# Altium PCB adaptador3.PcbDoc
Units mil, origin at the board's own origin, x right, y up, seen from the top; angles counter-clockwise.
Board outline 3895 x 3895 mil, 2 copper layers (Top Layer, Bottom Layer); 69 components, 76 nets, 366 pads, 115 vias.
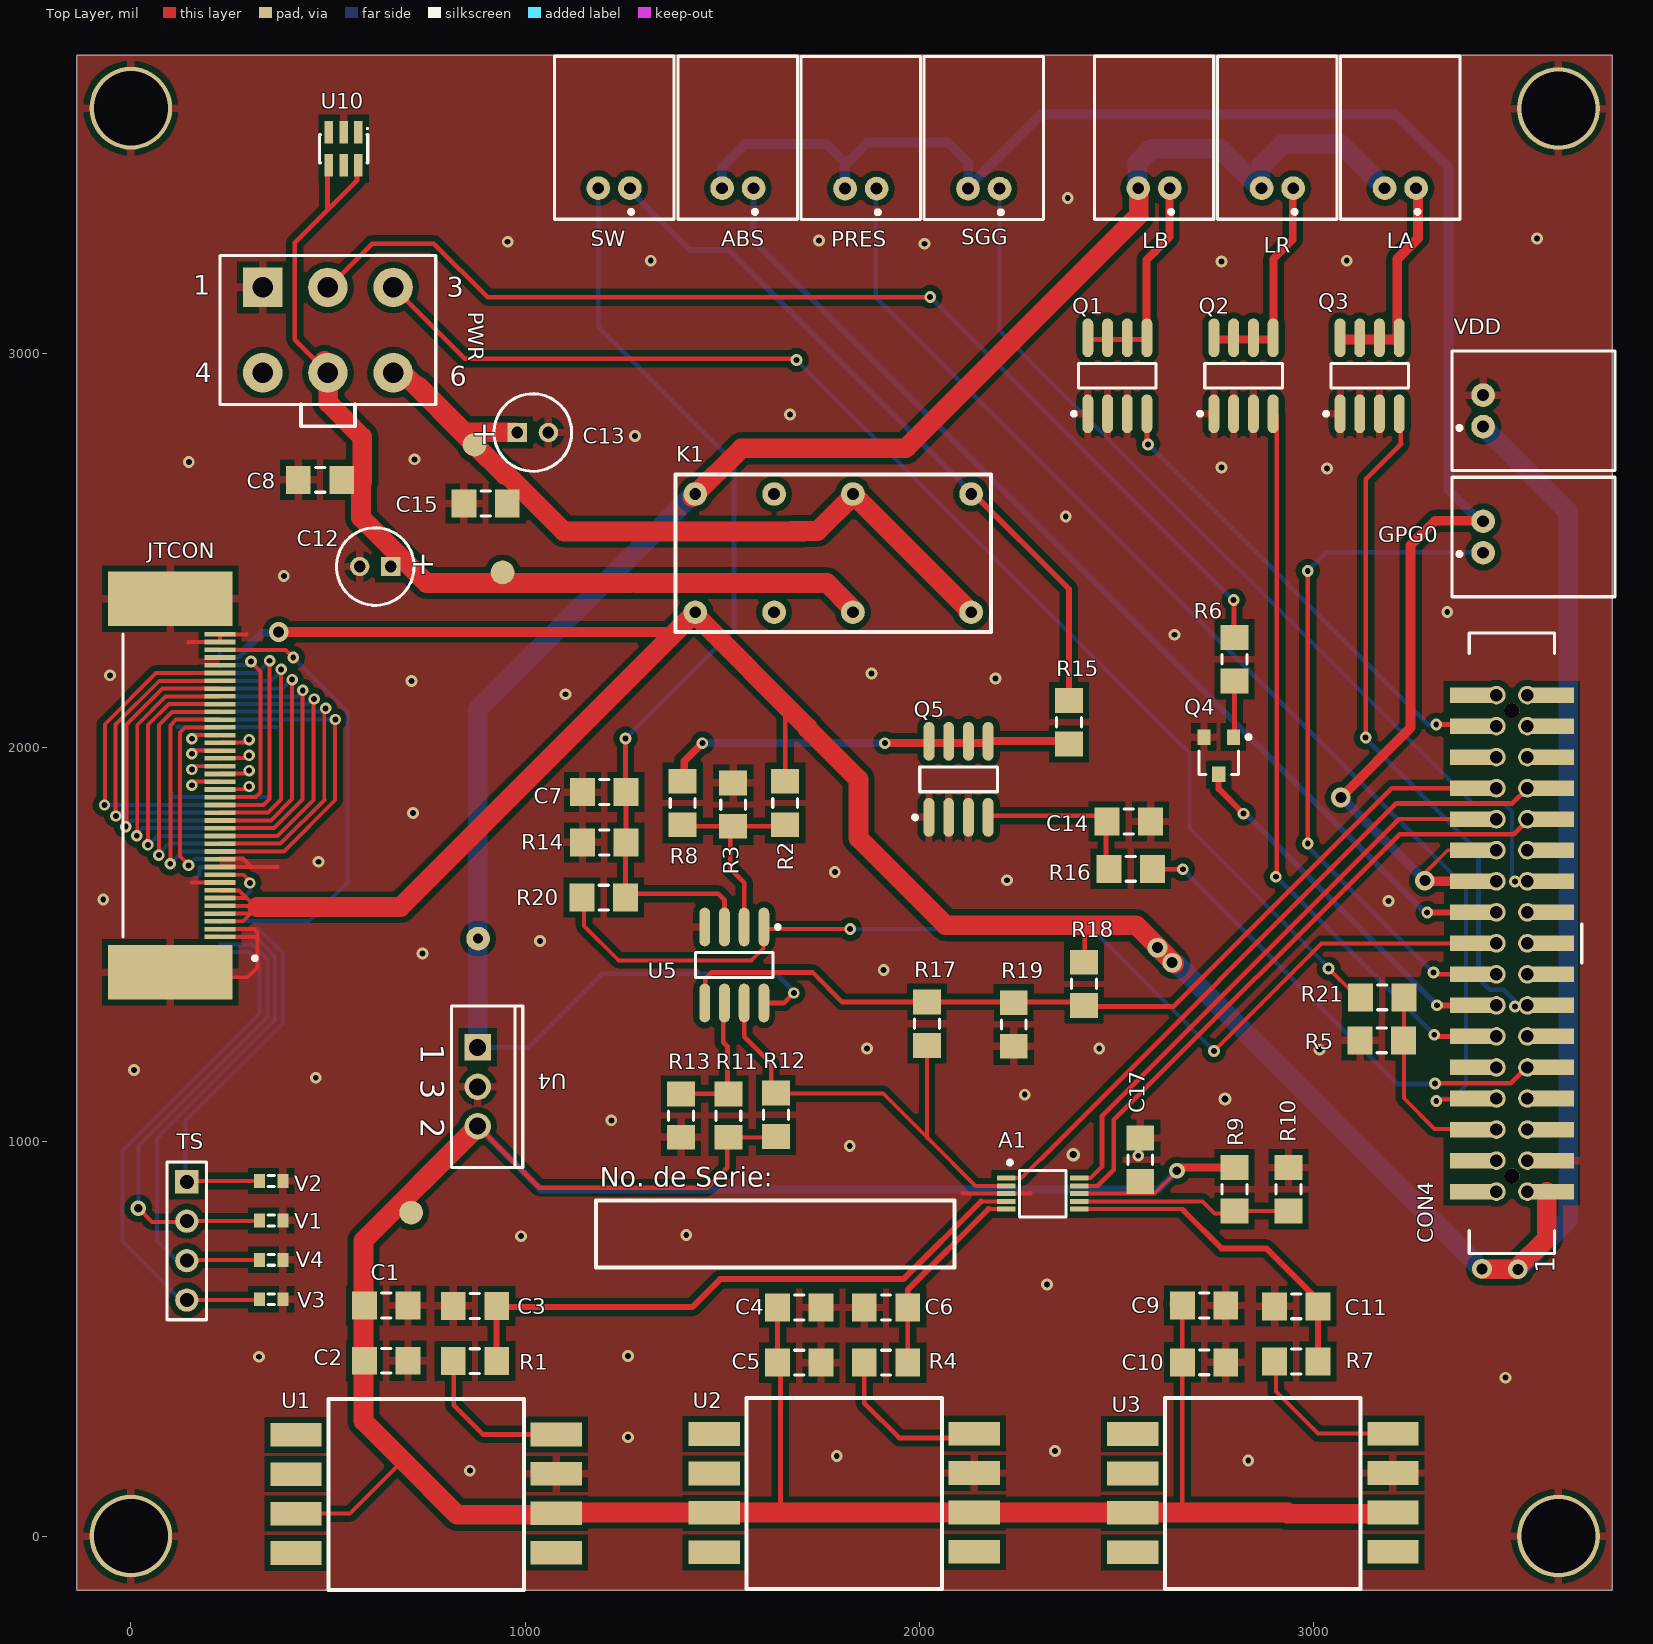
[diagram p0: Top Layer view]
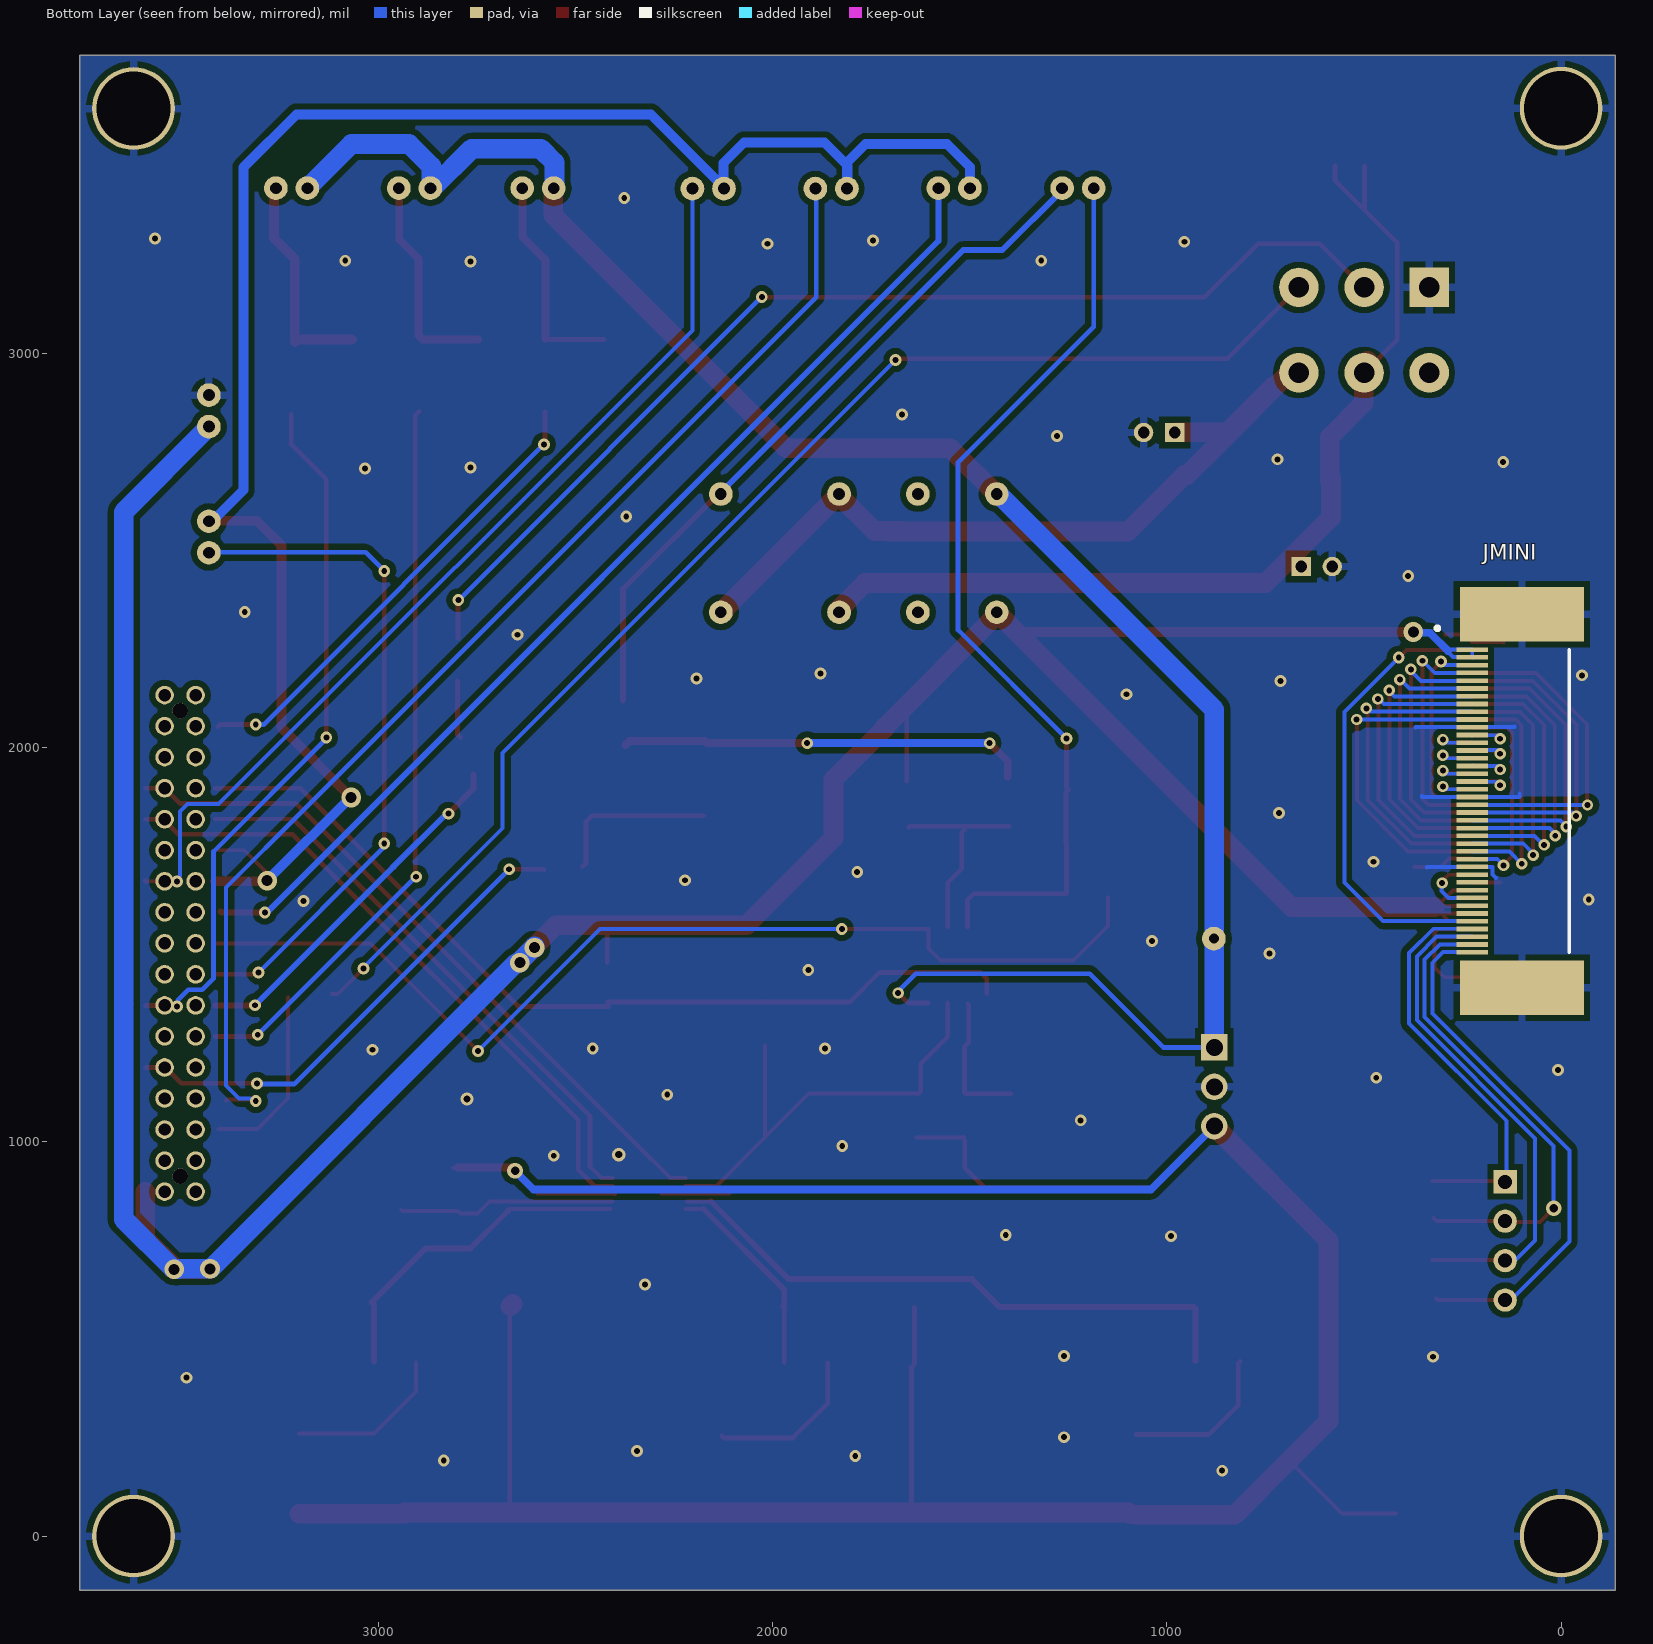
[diagram p1: Bottom Layer view, seen from below]

## Layer stack, top to bottom
Top Layer: signal copper 1.4
Dielectric: dielectric 12.6, FR-4, Dk 4.8
Bottom Layer: signal copper 1.4

## Board outline
-136.8,-137.24 -136.8,3757.76 3758.2,3757.76 3758.2,-137.24

## Design rules (kind name [scope] priority, off if disabled: settings)
Clearance Clearance_2 [(IsTrack) vs (IsTrack)] p1: gap=7
Clearance Clearance_1 [All vs (IsRegion)] p2: gap=15
Clearance [All] p3: gap=7
ComponentClearance [All] p1: gap=10 collisioncheckmode=3 verticalgap=100000 showdistances=FALSE
HoleSize [All] p1: absolutevalues=TRUE maxlimit=200 minlimit=15 maxpercent=80.000 minpercent=20.000
HoleToHoleClearance [All] p1: gap=7 allowstackedmicrovias=TRUE
MinimumSolderMaskSliver [All] p1 off: minsoldermaskwidth=7
NetAntennae [All] p1 off: netantennaetolerance=0
PlaneClearance [All] p1: clearance=15
PolygonConnect PolygonConnect_1 [isvia] p1: connectstyle=Direct reliefconductorwidth=10 reliefentries=4 polygonreliefangle="90 Angle"
PolygonConnect [All] p2: connectstyle=Relief reliefconductorwidth=20 reliefentries=4 polygonreliefangle="90 Angle"
RoomDefinition adaptador [InComponentClass('adaptador')] p1 off: confinementstyle=ConfineIn formatcopy=TRUE lockcomponents=FALSE outline -9958,-5315 -7958,-5315 -7958,-4315 -9958,-4315
RoutingVias [All] p1: holewidth=15 width=29 viastyle="Through Hole" minholewidth=15 minwidth=29 maxholewidth=28 maxwidth=50
SilkToSilkClearance [All] p1: silktosilkclearance=5
SilkscreenOverComponentPads [All] p1: minsilkscreentomaskgap=1
SolderMaskExpansion [All] p1: expansion=4
Width Width_1 [(InNet('3.3V') AND InNet('5V') AND InNet('12V') AND InNet('VDD5V') AND InNet('VDD') AND InNet('VCC'))] p1: maxlimit=100 minlimit=7 preferedwidth=25
Width [All] p2: maxlimit=100 minlimit=7 preferedwidth=10
20 further rules are at their usual default settings.

## Components (designator, comment, footprint, x,y, rotation, side; value= is the part's Value field where it differs from the comment)
A1 "ADS1118" MSOP-10 2314,869 r0 top
ABS "Header 2" Sherlock2H 1540,3420 r90 top
C1 "Cap Semi" 8-1206 648,585 r180 top
C2 "Cap Semi" 8-1206 648,445 r180 top
C3 "Cap Semi" 8-1206 873,584 r0 top
C4 "Cap Semi" 8-1206 1696,580 r180 top
C5 "Cap Semi" 8-1206 1696,440 r180 top
C6 "Cap Semi" 8-1206 1916,580 r0 top
C7 "Cap Semi" 8-1206 1201,1887.75 r0 top
C8 "Cap Semi" 8-1206 480,2680 r0 top
C9 "Cap Semi" 8-1206 2723,585 r180 top
C10 "Cap Semi" 8-1206 2723,441 r180 top
C11 "Cap Semi" 8-1206 2957,583 r0 top
C12 "Cap2" CAPPR2-5x6.8 620,2460 r180 top
C13 "Cap2" CAPPR2-5x6.8 1020,2800 r0 top
C14 "Cap Semi" 8-1206 2532.12,1813 r180 top
C15 "Cap Semi" 8-1206 900,2620 r0 top
C17 "Cap Semi" 8-1206 2561,955 r270 top
CON4 "Mini2440 17x2" HDR2X17HV 3504,1504 r90 top
GPG0 "Header 2" Sherlock2H 3431,2535 r0 top
JMINI "CL586-0557-8" FH12-40S-0.5SHD 225.52,1865.32 r270 bottom
JTCON "CL586-0527-7" FH12-40S-0.5SHD 226,1904.27 r90 top
K1 "Rele-DPDT" RELE-DPDT 2132,2494 r180 top
LA "Header 2" Sherlock2H 3221,3420 r90 top
LB "Header 2" Sherlock2H 2596,3420 r90 top
LR "Header 2" Sherlock2H 2909,3420 r90 top
PRES "Header 2" Sherlock2H 1852,3419 r90 top
PWR "Pin Header 3x2" bigHDR2X3 500,3060 r0 top
Q1 "SI4156DY" SO8_M_MOSFET 2503,2944 r90 top
Q2 "SI4156DY" SO8_M_MOSFET 2823,2944 r90 top
Q3 "SI4156DY" SO8_M_MOSFET 3143,2944 r90 top
Q4 "BCW31" SOT-23A 2760,1980 r180 top
Q5 "SI4156DY" SO8_M_MOSFET 2100,1920 r90 top
R1 "Res" 8-1206 873,444 r180 top
R2 "Res" 8-1206 1660,1860 r90 top
R3 "Res" 8-1206 1528.25,1856 r270 top
R4 "Res" 8-1206 1916,440 r180 top
R5 "Res" 8-1206 3174,1258 r180 top
R6 "Res" 8-1206 2800,2224.88 r90 top
R7 "Res" 8-1206 2957,443 r180 top
R8 "Res" 8-1206 1400,1860 r270 top
R9 "Res" 8-1206 2800,880 r90 top
R10 "Res" 8-1206 2937,880 r270 top
R11 "Res" 8-1206 1516,1067 r90 top
R12 "Res" 8-1206 1637,1069 r90 top
R13 "Res" 8-1206 1396,1067 r270 top
R14 "Res" 8-1206 1201,1760 r0 top
R15 "Res" 8-1206 2380,2064.88 r90 top
R16 "Res" 8-1206 2537,1693 r180 top
R17 "Res" 8-1206 2020,1300 r270 top
R18 "Res" 8-1206 2418,1401 r270 top
R19 "Res" 8-1206 2240,1298 r270 top
R20 "Res" 8-1206 1200,1620 r0 top
R21 "Res" 8-1206 3175,1367 r0 top
SGG "Header 2" Sherlock2H 2164,3419 r90 top
SW "Pin Header 2x1" Sherlock2H 1226,3420 r90 top
TS "Header 4" HDR1X4 142,899 r270 top
U1 "MPXV7002" "CASE 1351-01" 1079,-42 r180 top
U2 "MPXV7002" "CASE 1351-01" 2140,-40 r180 top
U3 "MPXV7002" "CASE 1351-01" 3202,-40 r180 top
U4 "L7805CV" TO220ABN 880,1140 r270 top
U5 "LM393D" SO8_M 1531,1449 r270 top
U10 "TVS 82400102" SOT23-6 540,3520 r180 top
V1 "Res Semi" RESC1608L 356,801 r0 top
V2 "Res Semi" RESC1608L 356,901 r0 top
V3 "Res Semi" RESC1608L 356,601 r0 top
V4 "Res Semi" RESC1608L 356,701 r0 top
VDD "Pin Header 2x1" Sherlock2H 3431,2855 r0 top
? "Comment" Serie 1180,680 r0 top

## Footprints (in the part's own frame and the unit in brackets; to place one, negate y for a bottom-side part, rotate by r counter-clockwise, add the part's x,y. Pads: shape width x height; smd on the part's side, far side on the other; paste and mask are expansions set on the pad)
8-1206 [mm] "Chip Resistor; Body 3.1 x 1.6 mm (LxW typ)"
  rect 1.6x1.8 smd: 1(-1.4,0) 2(1.4,0)
  silkscreen extent -0.3,-0.8 0.3,0.8
bigHDR2X3 [mm] "Connector; Header; 3x2 Position"
  rect 2.54x2.54 hole 1.321: 1(-4.2,2.75)
  round 2.54 hole 1.321: 2(0,2.75) 3(4.2,2.75) 4(-4.2,-2.75) 5(0,-2.75) 6(4.2,-2.75)
  silkscreen extent -6.96,-6.2 6.95,4.8
CAPPR2-5x6.8 [mm] "Capacitor, Electrolytic, Radial; Body 5 x 6.8 mm (Dia.xH typ); Pin Spacing 2 mm (typ)"
  rect 1.25x1.25 hole 0.75: 1(-1,0)
  round 1.25 hole 0.75: 2(1,0)
  silkscreen extent -2.5,-2.5 2.5,2.5
"CASE 1351-01" [mil]
  rect 130x60 smd: 1(0,0) 2(0,-100) 3(0,-200) 4(0,-300) 5(659.84,1) 6(659.84,-99) 7(659.84,-199) 8(659.84,-299)
  silkscreen extent 82,-390 578,94
FH12-40S-0.5SHD [mm] "Connector; FH12 Series; 40 Position; 0.5mm Spaced Bottom Contact"
  rect 0.3x2 smd: 1(-9.75,0) 2(-9.25,0) 3(-8.75,0) 4(-8.25,0) 5(-7.75,0) 6(-7.25,0) 7(-6.75,0) 8(-6.25,0) 9(-5.75,0) 10(-5.25,0) 11(-4.75,0) 12(-4.25,0) 13(-3.75,0) 14(-3.25,0) 15(-2.75,0) 16(-2.25,0) 17(-1.75,0) 18(-1.25,0) 19(-0.75,0) 20(-0.25,0) 21(0.25,0) 22(0.75,0) 23(1.25,0) 24(1.75,0) 25(2.25,0) 26(2.75,0) 27(3.25,0) 28(3.75,0) 29(4.25,0) 30(4.75,0) 31(5.25,0) 32(5.75,0) 33(6.25,0) 34(6.75,0) 35(7.25,0) 36(7.75,0) 37(8.25,0) 38(8.75,0) 39(9.25,0) 40(9.75,0)
  rect 3.5x8 smd: 41(-12.032,3.203) 42(12.032,3.203)
  silkscreen extent -11.25,-2.38 9.75,6.25
HDR1X4 [mm] "Connector; Header; 4 Position"
  rect 1.5x1.5 hole 0.9: 1(0,0)
  round 1.5 hole 0.9: 2(2.54,0) 3(5.08,0) 4(7.62,0)
  silkscreen extent -1.27,-1.27 8.89,1.27
HDR2X17HV [mm] "Connector; Header; 17x2 Position"
  round 1 hole 1 mask+0: 0(-15,0) 0(15,0)
  rect 1x3 smd: 1(-16,-2.5) 2(-16,2.5) 3(-14,-2.5) 4(-14,2.5) 5(-12,-2.5) 6(-12,2.5) 7(-10,-2.5) 8(-10,2.5) 9(-8,-2.5) 10(-8,2.5) 11(-6,-2.5) 12(-6,2.5) 13(-4,-2.5) 14(-4,2.5) 15(-2,-2.5) 16(-2,2.5) 17(0,-2.5) 18(0,2.5) 19(2,-2.5) 20(2,2.5) 21(4,-2.5) 22(4,2.5) 23(6,-2.5) 24(6,2.5) 25(8,-2.5) 26(8,2.5) 27(10,-2.5) 28(10,2.5) 29(12,-2.5) 30(12,2.5) 31(14,-2.5) 32(14,2.5) 33(16,-2.5) 34(16,2.5)
  round 1.2 hole 0.8: 1(-16,-1) 2(-16,1) 3(-14,-1) 4(-14,1) 5(-12,-1) 6(-12,1) 7(-10,-1) 8(-10,1) 9(-8,-1) 10(-8,1) 11(-6,-1) 12(-6,1) 13(-4,-1) 14(-4,1) 15(-2,-1) 16(-2,1) 17(0,-1) 18(0,1) 19(2,-1) 20(2,1) 21(4,-1) 22(4,1) 23(6,-1) 24(6,1) 25(8,-1) 26(8,1) 27(10,-1) 28(10,1) 29(12,-1) 30(12,1) 31(14,-1) 32(14,1) 33(16,-1) 34(16,1)
  silkscreen extent -20,-4.5 20,2.75
MSOP-10 [mm] "SOIC, 8-Leads, Body 5.0x4.0mm (max), Pitch 1.27mm, IPC Medium Density"
  rect 1.2x0.32 smd: 1(-2.35,1) 2(-2.35,0.5) 3(-2.35,0) 4(-2.35,-0.5) 5(-2.35,-1) 6(2.35,-1) 7(2.35,-0.5) 8(2.35,0) 9(2.35,0.5) 10(2.35,1)
  silkscreen extent -2.25,-1.5 1.5,2.12
RELE-DPDT [mil]
  round 60 hole 30: 1(0,-150) 2(300,-150) 3(500,-150) 4(700,-150) 5(700,150) 6(500,150) 7(300,150) 8(0,150)
  silkscreen extent -50,-200 750,200
RESC1608L [mm] "Chip Resistor, Body 1.6x0.8mm, IPC High Density"
  rect 0.7x0.9 smd: 1(-0.75,0) 2(0.75,0)
  silkscreen extent -0.2,-0.35 0.2,0.35, body extent -0.85,-0.48 0.85,0.48, height 0.9
Serie [mil]
  silkscreen extent 0,1 910,171
Sherlock2H [mil]
  round 60 hole 30: 1(0,-40) 2(0,40)
  silkscreen extent -79,-152 335,152
SO8_M [mm] "SOIC, 8-Leads, Body 4.9x3.9mm, Pitch 1.27mm, IPC Low Density"
  oval 2.5x0.7 smd: 1(-2.45,1.905) 2(-2.45,0.635) 3(-2.45,-0.635) 4(-2.45,-1.905) 5(2.45,-1.905) 6(2.45,-0.635) 7(2.45,0.635) 8(2.45,1.905)
  silkscreen extent -2.57,-2.5 0.8,2.93, body extent -2,-2.5 2,2.5, height 1.75
SO8_M_MOSFET [mm] "8-Pin Small Outline Integrated Circuit 1.27 mm Pitch, IPC Low Density"
  oval 2.5x0.7 smd: 1(2.45,-1.905) 1(2.45,-0.635) 1(2.45,0.635) 1(2.45,1.905) 2(-2.45,-1.905) 3(-2.45,-0.635) 3(-2.45,0.635) 3(-2.45,1.905)
  silkscreen extent -2.57,-2.5 0.8,2.93, body extent -2,-2.5 2,2.5, height 1.75
SOT23-6 [mm] "SOT-457/SC-74; 6 Leads; Body 3 x 3 mm, inc. leads (LxW max)"
  rect 0.55x1.45 smd: 1(-0.95,-1.075) 2(0,-1.075) 3(0.95,-1.075) 4(0.95,1.075) 5(0,1.075) 6(-0.95,1.075)
  silkscreen extent -1.58,-1.35 1.55,0.9
SOT-23A [mm] "SOT-23; 3 Leads; Body 3.1 x 2.5 mm, inc. leads (LxW max)"
  rect 0.85x1 smd: 1(-0.95,-1.2) 2(0.95,-1.2) 3(0,1.2)
  silkscreen extent -2.05,-1.32 1.28,1.2
TO220ABN [mm] "TO, Thru-Hole, Vertical, Heatsink Mounted; 3 In-Line Leads; Pitch 2.54 mm; Pin sequence 1, 3, 2"
  rect 1.7x1.7 hole 1.1: 1(-2.54,0)
  round 1.7 hole 1.1: 2(2.54,0) 3(0,0)
  silkscreen extent -5.2,-1.7 5.2,2.9

## Part data
ABS GPG0 LA LB LR PRES SGG: "mini_header 2x1"
C1 C2 C3 C4 C5 C6 C7 C8 C9 C10 C11 C14 C15 C17: "Capacitor cerámico"
C12 C13: "Capacitor"
CON4: "Header, 17-Pin, Dual row"
JMINI JTCON: "FPC 40pos 0.5mm"
K1: "Dual-Pole Dual-Throw Relay"
PWR: library part "Vertical Pin Header 3x2", "Minifit 6pos v/h 4.2mm"
Q1 Q2 Q3 Q5: library part MOSFET-N, "N-Channel MOSFET"
Q4: "NPN Epitaxial Silicon Transistor"
R1 R2 R3 R4 R5 R6 R7 R8 R9 R10 R11 R12 R13 R14 R15 R16 R17 R18 R19 R20 R21: "Resistor"
SW VDD: library part "Vertical Pin Header PCB 2x1", "mini_header 2x1"
TS: "Header 4pos 2.54mm"
U1 U2 U3: "Sensor de presión diferencial"
U4: "Positive Voltage Regulator"
U5: "Low-Power Dual Voltage Comparator"
U10: "Electric Field Imaging Device"
V1 V2 V3 V4: "Semiconductor Resistor"

## Free pads (board coordinates)
  round 210 hole 188: 0(-0.17,-0.17) 0(-0.17,3622.86) 0(3621.87,-0.17) 0(3621.87,3621.87)
  round 60 smd: 0(711,821) 3(943,2445) 4(872,2769)
  round 60 hole 25: 1(881,1516)

## Via types
v1: diameter 30, hole 15, Top Layer to Bottom Layer, 78 vias
v2: diameter 29, hole 15, Top Layer to Bottom Layer, 26 vias
v3: diameter 50, hole 28, Top Layer to Bottom Layer, 7 vias
v4: diameter 34, hole 18, Top Layer to Bottom Layer, 2 vias
v5: diameter 40, hole 22, Top Layer to Bottom Layer, 2 vias

## Nets (pads, with @x,y where several pads share a name; then routed paths per layer and width w, separated by ;. In a path a pad name is that pad's centre, name@x,y a point inside that pad or via, vN(x,y) a via of type N, cw(c..) or ccw(c..) an arc to the next point about the centre after c; other vN are vias at no path point)
5V: C8.2 C12.1 K1.7 pad.3 PWR.5 U10.4 U10.6 | length 2517.6
  Top Layer w12: U10.4@499,3477 499,3365 ; PWR.5 416,3035.73 416,3282 499,3365 ; U10.6@574,3476 574,3440 499,3365
  Top Layer w50: PWR.5@491,2982 501,2972 501,2875 586.88,2789.12 586.88,2676 ; 584,2685 584,2584 750,2418 1267,2418 ; 1280,2419 1281,2418 1766,2418 K1.7@1834,2350
12V: C13.1 C15.2 K1.2 K1.8 pad.4 PWR.6 | length 2137.3
  Top Layer w50: PWR.6@664,2947 694,2947 pad.4 949,2692 956,2692 1099,2549 1709,2549 ; 728,2919 846,2801 C13.1@976,2801 ; 1675,2550 1742,2550 1834,2642 K1.8@2131,2345 ; K1.8@2124,2345 K1.8@2131,2345 ; K1.8 K1.8@2131,2345 ; K1.8@2136,2345 K1.8@2131,2345
ABS: ABS.1 CON4.20@3405.57,1582.74 | length 2662.1
  Top Layer w15: v1(3289,1582) 3398,1582 CON4.20@3401,1585
  Bottom Layer w15: ABS.1 1580,3286 3284,1582 v1(3289,1582)
ACP: CON4.14@3405.57,1346.52 Q4.3 | length 917.9
  Top Layer w15: Q4.3 2760,1896 v1(2823,1833) ; v1(3314,1347) 3314.48,1346.52 CON4.14@3415.42,1346.52
  Bottom Layer w15: v1(2823,1833) 2828,1833 2963,1698 2963,1697 ; 2965,1696 v1(3314,1347)
AIR: A1.6 C11.2 R7.1 | length 851.5
  Top Layer w10: A1.6@2412,830 2669,830
  Top Layer w15: 2672,825 2767,730 2881,730 3018,593 3012.12,587.12 C11.2 R7.1
B0: JMINI.3 JTCON.19 | length 529.7
  Top Layer w10: JTCON.19 316.74,1874.74 329,1887 329,2194 305,2218 v1(305,2219)
  Bottom Layer w10: JMINI.3@229,2210 296,2210 v1(305,2219)
B1: JMINI.4 JTCON.18 | length 625.7
  Top Layer w10: JTCON.18@224,1855 337,1855 352,1870 v2@352,2223
  Bottom Layer w10: JMINI.4@226.48,2189.63 320.63,2189.63 v2(352,2221)
B2: JMINI.5 JTCON.17 | length 663.5
  Top Layer w10: JTCON.17@226,1835.73 347.44,1835.73 381,1869.29 381,2126 v2(381,2199)
  Bottom Layer w10: JMINI.5@226.48,2169.94 355.94,2169.94 v2@381,2195
B3: JMINI.6 JTCON.16 | length 694.8
  Top Layer w10: JTCON.16@226,1816.04 355.59,1816.04 408,1868.45 ; 408.4,1870.4 408.4,2102 v2@408.4,2171.6
  Bottom Layer w10: JMINI.6@226.48,2150.26 384.26,2150.26 v2@407,2173
  other v2: 409,2173
B4: JMINI.7 JTCON.15 | length 729.3
  Top Layer w10: JTCON.15@226.27,1796.63 363.63,1796.63 435.8,1868.8 v2@435.8,2145
  Bottom Layer w10: JMINI.7@226.48,2130.57 422.57,2130.57 v2@435,2143
  other v2: 436,2146
B5: JMINI.8 JTCON.14 | length 774.4
  Top Layer w10: JTCON.14@226,1776.67 371.9,1776.67 463.2,1867.97 v2@463.2,2124
  Bottom Layer w10: JMINI.8@226.48,2110.89 449.89,2110.89 v2@464,2125
  other v2: 465,2124
B6: JMINI.9 JTCON.13 | length 815.1
  Top Layer w10: JTCON.13@226,1756.98 380.05,1756.98 491,1867.93 ; 490.6,1867.93 v2@490.6,2101
  Bottom Layer w10: JMINI.9 483.7,2091.7 v2@484,2092 ; v2@482.2,2092.2 v2@491,2101
  other v2: 494,2100
B7: JMINI.10 JTCON.12 | length 845.1
  Top Layer w10: JTCON.12@226,1737.3 388.21,1737.3 518,1867.09 v2@518,2074
  Bottom Layer w10: JMINI.10@226.52,2071.52 v2@519,2071.52
  other v2: 519,2072
BAT: CON4.6 R5.1 R21.2 | length 464.3
  Top Layer w10: R21.2 3230.12,1110.88 3308,1033 CON4.6@3406,1033
CSSPI: A1.2 R12.2 R17.2 U5.7 | length 1185.4
  Top Layer w10: R12.2@1630,1123 1909,1123 2020,1012 ; R17.2 2020,1012 ; 2022,1009 2020,1011 2020,1012 ; A1.2 2143.31,888.69 2020,1012
  Top Layer w12: U5.7 1556,1267 1625,1198 1625,1128 R12.2@1630,1123
G0: JMINI.12 JTCON.27 | length 140.4
  Top Layer w10: v2@157,2032.69 JTCON.27@225,2032.69
  Bottom Layer w10: v2@154,2032 225,2032 JMINI.12@226,2031
  other v2: 155,2023
G1: JMINI.13 JTCON.26 | length 149
  Top Layer w10: JTCON.26@228,2014 v2@300,2014
  Bottom Layer w10: JMINI.13 v2@301,2012.96 ; v2@290.5,2019.96 v2@291.54,2021
  other v2: 300,2021
G2: JMINI.14 JTCON.25 | length 144
  Top Layer w10: v2@154,1993.32 JTCON.25@225,1993.32 ; v2@160,1985 v2@160.68,1984.32
  Bottom Layer w10: v2@153,1994 JMINI.14@225,1994
  other v2: 155,1985
G3: JMINI.15 JTCON.24 | length 149.1
  Top Layer w10: JTCON.24@228,1974 v2@301,1974
  Bottom Layer w10: JMINI.15 v2@301,1973.59 ; v2@290.5,1980.59 v2@290.91,1981
  other v2: 300,1981
G4: JMINI.16 JTCON.23 | length 141.5
  Top Layer w10: v2(155,1945) v2@155.05,1944.95 ; v2@155,1953 JTCON.23@225,1953.95
  Bottom Layer w10: v2@154,1954 224,1954 JMINI.16@225,1955
G5: JMINI.17 JTCON.22 | length 148.6
  Top Layer w10: JTCON.22@229,1935 v2@302,1935
  Bottom Layer w10: JMINI.17 v2@300,1934.22 ; v2@290.5,1941.22 v2@291.28,1942
  other v2: 300,1942
G6: JMINI.18 JTCON.21 | length 145.2
  Top Layer w10: v2@155,1914.58 JTCON.21@225,1914.58 ; v2@156,1905 v2@156.58,1905.58
  Bottom Layer w10: v2@154,1914 227,1914 JMINI.18@228,1915
  other v2: 155,1905
G7: JMINI.19 JTCON.20 | length 147.6
  Top Layer w10: JTCON.20@225,1894.89 v2@300,1894.89 ; v2@290.5,1901.89 v2@290.61,1902 ; v2@290.5,1902 v2@291.5,1902
  Bottom Layer w10: JMINI.19@228,1896 229,1895 v2@299,1895
  other v2: 300,1902
GND: A1.3 C1.1 C2.1 C3.1 C4.1 C5.1 C6.1 C7.1 C8.1 C9.1 C10.1 C11.1 C12.2 C13.2 C14.1 C15.1 C17.1 CON4.3@3602.43,952.82 JMINI.11 JMINI.20 JMINI.29 JMINI.41 JMINI.42 JTCON.1 JTCON.2 JTCON.8 JTCON.10 JTCON.11 JTCON.36 JTCON.37 JTCON.39 JTCON.40 JTCON.41 JTCON.42 pad.0@3621.87,3621.87 pad.0@3621.87,-0.17 pad.0@-0.17,3622.86 pad.0@-0.17,-0.17 PWR.1 Q1.3 Q2.3 Q3.3 Q4.2 Q5.3 R3.1 R5.2 R10.1 R13.2 R14.1 R19.2 U1.3 U2.3 U3.3 U4.3 U5.4 U10.2 V1.2 V2.2 V3.2 V4.2 VDD.2 | length 1812
  Top Layer w10: 146,2267 146,2268.44 JTCON.39 ; 154,1659 154.8,1658.2 JTCON.8 ; JTCON.1 319.59,1520.41 320,1520 ; JTCON.2 312.9,1540.1 321,1532 321,1443 296,1418 JTCON.41@235,1418 ; JTCON.10 372,1697.57 372,1699 ; JTCON.11 226,1719 285,1719 305,1699 ; JTCON.36@226,2209 JTCON.36 ; JTCON.39@226,2269 JTCON.40 294,2288.12 294,2289 ; 2110,870 2110,869 A1.3 2282,869 2283,870
  Bottom Layer w10: JMINI.41@43,2339.02 JMINI.41 ; JMINI.42@88,1391.62 JMINI.42 ; 105,1884 105,1875.17 JMINI.20 353,1875.17 353,1878 ; 118,2054 118,2052.33 JMINI.11 369,2052.33 369,2051 ; 165,1670 174,1679 174,1698 JMINI.29 340,1698 340,1696
  other v1: 860,166 2835,192 1791,203 2345,216 1261,251 3488,402 325,455 1261,457 2324,638 990,761 1409,764 2556,965 1824,990 1219,1055 2268,1120 469,1163 8,1183 3016,1234 1868,1237 2457,1237 1910,1436 740,1478 1038,1510 3191,1611 -70,1615 2223,1664 1786,1685 476,1711 716,1835 1103,2136 712,2170 2194,2176 -53,2184 1879,2189 2648,2287 3340,2345 388,2436 2372,2587 3035,2709 2767,2711 147,2725 720,2732 1279,2791 1672,2846 2767,3234 1319,3236 3085,3236 2014,3279 956,3284 1746,3287 3568,3292 2377,3395
  other v4: 2391,968 2776,1109
GPG0: CON4.16@3405.57,1425.26 GPG0.1 | length 1720
  Top Layer w12: v1(2986,1757) v1(2986,2449) ; v1(3305,1430) 3309.74,1425.26 CON4.16@3415.42,1425.26
  Bottom Layer w12: v1(2986,1757) 2986,1749 v1(3305,1430) ; v1(2986,2449) 3033,2496 GPG0.1@3423,2496
HSYNC: JMINI.35
LCD_PWR: JMINI.30
LEDA: CON4.13@3602.43,1346.52 Q3.2 | length 1804.9
  Top Layer w12: v1(3133,2026) 3133,2681 3223,2771 3222,2772 Q3.2@3222,2847 ; v1(3512,1344) 3511,1344 3510,1345 v1@3516,1345 ; v1@3517,1346 3517,1346.52 CON4.13@3592.58,1346.52 ; CON4.13@3627,1348 CON4.13@3632,1353
  Bottom Layer w12: v1(3133,2026) 3133,2023 3419,1737 3419,1415 3448,1386 3483,1386 3510,1359 v1@3510,1348
LEDB: CON4.32@3405.57,2055.18 Q1.2 | length 1206.7
  Top Layer w12: Q1.2@2578,2851.87 2578,2773 v1(2581,2770) ; v1(3312,2059) 3403,2059 CON4.32@3408,2054
  Bottom Layer w12: v1(2581,2770) 3292,2059 v1(3312,2059)
LEDR: CON4.12@3405.57,1267.78 Q2.2 | length 1857
  Top Layer w12: Q2.2@2897,2854 2907,2844 v1@2907,1677 ; v1(3307,1272) 3311.22,1267.78 CON4.12@3415.42,1267.78
  Bottom Layer w12: v1@2907,1672 v1(3307,1272)
  other v1: 2905,1673
N2O: A1.5 C6.2 R4.1 | length 526.4
  Top Layer w10: 2176,830 A1.5@2222,830
  Top Layer w12: R4.1 C6.2
  Top Layer w15: C6.2@1971.12,579.12 C6.2@1975,583 ; C6.2 1971.12,625.12 2176,830
NetA1_7: A1.7 R9.1 R10.2 | length 547.6
  Top Layer w10: A1.7 2718.68,849.32 2749,819 2793,819 R9.1@2796,822 ; R9.1 R10.2 2939.88,824.88 R10.2@2943,828
NetC7_2: C7.2 R14.2 R20.2 SW.2 U5.3 | length 2366.2
  Top Layer w12: C7.2@1249,1894 1255,1900 v1(1255,2024) ; R14.2@1256,1757 1255,1756 1255,1630 1490,1630 1506,1614 U5.3 ; R14.2@1256,1760 C7.2@1256,1887.75
  Bottom Layer w12: SW.2 1186,3068 1530,2724 1530,2299 v1(1255,2024)
NetC14_2: C14.2 Q5.2 R16.2 | length 423.9
  Top Layer w12: Q5.2@2175,1827.87 2459.13,1827.87 2474,1813 2474,1707 R16.2@2483,1698
NetK1_1: K1.1 R15.2 SW.1 | length 1818.8
  Top Layer w15: K1.1@2133,2650 2380,2403 R15.2
  Bottom Layer w15: SW.1@1266,3415 1418,3263 1517,3263 K1.1@2134,2646
NetLA_1: LA.1 Q3.1 | length 561
  Top Layer w25: Q3.1@3068,3036.13 3118,3036.13 3168,3036.13 3206.87,3036.13 3213,3030 3213,3240 3266,3293 3266,3413 LA.1@3260,3419
NetLB_1: LB.1 Q1.1 | length 554.8
  Top Layer w12: Q1.1@2428,3036.13 2478,3036.13 2528,3036.13 2575.13,3036.13 Q1.1@2577,3038
  Top Layer w20: Q1.1@2577,3038 2577,3238 2635,3296 LB.1@2635,3419
NetLR_1: LR.1 Q2.1 | length 548
  Top Layer w20: Q2.1@2748,3036.13 2798,3036.13 2848,3036.13 2889.13,3036.13 2899,3046 2899,3241 2948,3290 2948,3413 LR.1@2944,3417
NetPWR_2: PWR.2 R6.2 | length 2816.2
  Top Layer w12: PWR.2@503,3170 612,3279 769,3279 905,3143 2021,3143 2024,3140 v1(2028,3144) ; R6.2@2799,2278 v1@2799,2373
  Bottom Layer w12: v1(2028,3144) v1@2800,2372
  other v1: 2798,2375
NetPWR_3: PWR.3 R21.1 | length 3313.7
  Top Layer w10: v1(1689,2984) 1689,2985 v1@1691,2987 ; v1(3039,1440) 3104,1375 R21.1@3118,1375
  Top Layer w12: PWR.3 846.62,2987 v1@1691,2987
  Bottom Layer w10: v1(1689,2984) 2686,1987 2686,1796 3039,1443 v1(3039,1440)
NetQ4_1: Q4.1 R6.1 | length 147.1
  Top Layer w12: Q4.1@2792,2026 2800,2034 R6.1
NetQ5_1: Q5.1 R8.1 R15.1 | length 1033.6
  Top Layer w20: R8.1@1404,1927.63 1404,1966 v2(1450,2012) ; v2(1913,2012) 1913.13,2012.13 2025,2012.13 2075,2012.13 2125,2012.13 2167.13,2012.13 2172,2017 2364,2017 R15.1@2374,2007
  Bottom Layer w20: v2(1450,2012) v2(1913,2012)
NetR1_2: R1.2 U1.4 | length 403.3
  Top Layer w12: R1.2@815,443 819,439 819,332 893,258 U1.4
NetR2_1: R2.1 R3.2 R8.2 U5.2 | length 519.6
  Top Layer w12: R8.2@1400.5,1800.88 R3.2 1652.12,1800.88 R2.1@1655,1798 ; R3.2@1514,1792 1521,1785 1521,1693 1556,1658 U5.2
NetR4_2: R4.2 U2.4 | length 411
  Top Layer w12: R4.2 1860.88,337.12 1949,249 2124,249 U2.4@2130,255
NetR7_2: R7.2 U3.4 | length 414.3
  Top Layer w10: R7.2@2905,440 2905,367 3012,260 U3.4
NetR11_2: R11.2 R13.1 U5.6 | length 350.6
  Top Layer w12: R13.1 1511.12,1122.12 1514,1125 1514,1242 1503,1253 1503,1349 U5.6@1505,1351
NRESET_LCD: JMINI.32
NSS_SPI: CON4.28@3405.57,1897.7 R17.1 R18.2 R19.1 U5.5 | length 2269.1
  Top Layer w12: U5.5@1457,1376 1457,1414 1473,1430 1730,1430 1804.88,1355.12 R17.1@2014.88,1355.12 ; R17.1@2013,1357 R17.1@2014.88,1355.12 ; R18.2@2417,1344 2646,1344 3199.7,1897.7 CON4.28@3415.42,1897.7 ; R18.2@2420,1355.12 2240,1355.12 R17.1 R17.1@2014.88,1355.12
O2: A1.4 C3.2 R1.1 | length 1535.9
  Top Layer w10: 2157.5,849.5 2184.08,849.5 2184.58,849 A1.4@2218,849
  Top Layer w15: R1.1 928.12,578.12 931,581 1424,581 1495,652 1960,652 2157,849
OFF: CON4.9@3602.43,1189.04 R16.1 | length 1255.3
  Top Layer w12: R16.1@2580,1691 2581,1692 v1(2669,1692) ; v1@3307,1149 3501,1149 3541.04,1189.04 CON4.9@3592.58,1189.04
  Bottom Layer w12: v1(2669,1692) 3214,1147 v1@3307,1147
  other v1: 3309,1148
PBGND: ABS.2 CON4.22@3405.57,1661.48 CON4.24 GPG0.2 PRES.2 SGG.2 | length 4749.7
  Top Layer w10: v3@3283,1667 3283,1682 3341.22,1740.22 CON4.24@3405.57,1740.22
  Top Layer w25: v3(3070,1874) 3247,2051 3247,2514 3309,2576 GPG0.2@3417,2576 ; v3(3283,1663) 3284.52,1661.48 CON4.22@3415.42,1661.48
  Bottom Layer w25: ABS.2 1500,3474 1558,3532 1765,3532 1812,3485 1812,3479 ; v3(3070,1874) 3072,1874 v3(3283,1663) ; GPG0.2@3424,2573 3343,2654 3343,3473 3209,3607 2309,3607 2125,3423 2125,3484 2073,3536 1869,3536 1812,3479 ; 1812,3479 1810,3477 1810,3416 1812,3418 PRES.2 1812,3479
PRES: CON4.8 PRES.1 | length 3059.4
  Top Layer w10: v1@3315,1100 3323,1108 3385,1108 CON4.8@3388,1105
  Bottom Layer w10: 3287.5,1745.5 3387,1646 3387,1143 3354,1110 3325,1110 v1@3315,1100
  Bottom Layer w12: PRES.1@1890,3415 1890,3143 3287.5,1745.5
  other v1: 3312,1104
R0: JMINI.21 JTCON.35 | length 845.1
  Top Layer w10: v2@-66,1853 -66,2059.91 63.79,2189.7 JTCON.35
  Bottom Layer w10: v2@-67,1855.48 JMINI.21
  other v2: -67,1855
R1: JMINI.22 JTCON.34 | length 811.2
  Top Layer w10: -39,2059.07 71.95,2170.02 JTCON.34 ; v2@-38.6,1826 -38.6,2059.07
  Bottom Layer w10: v2(-38,1827) -29.2,1835.8 JMINI.22
R2: JMINI.23 JTCON.33 | length 774.5
  Top Layer w10: v2@-11.2,1803 -11.2,2059.03 80.1,2150.33 JTCON.33
  Bottom Layer w10: v2@-12,1802.1 -12,1802 2.11,1816.11 JMINI.23
  other v2: -13,1800
R3: JMINI.24 JTCON.32 | length 729.7
  Top Layer w10: v2@16.2,1782 16.2,2058.2 88.37,2130.37 225.73,2130.37 JTCON.32
  Bottom Layer w10: v2@17,1784 29.43,1796.43 JMINI.24
  other v2: 15,1777
R4: JMINI.25 JTCON.31 | length 698.9
  Top Layer w10: v2@45,1754 43.6,1755.4 43.6,1825 43.6,2056.6 44,2057 44,2058.55 96.41,2110.96 JTCON.31
  Bottom Layer w10: v2@45,1754 67.74,1776.74 JMINI.25
  other v2: 43,1754
R5: JMINI.26 JTCON.30 | length 667.5
  Top Layer w10: v2(71,1728) 71,1801 71,2057.71 104.56,2091.27 JTCON.30
  Bottom Layer w10: v2(71,1728) 71,1732 96.06,1757.06 JMINI.26
R6: JMINI.27 JTCON.29 | length 625.7
  Top Layer w10: v2@100,1704 100,2057 115,2072 JTCON.29@228,2072
  Bottom Layer w10: v2(100,1706) 131.37,1737.37 JMINI.27
R7: JMINI.28 JTCON.28 | length 536.7
  Top Layer w10: v1(146,1702) 146,1704 125,1725 125,2039 137.91,2051.9 JTCON.28
  Bottom Layer w10: v1(146,1702) 162,1718 JMINI.28@224,1718
SGG: CON4.21@3602.43,1661.48 SGG.1 | length 2417.8
  Top Layer w10: v1@3519,1661.48 CON4.21@3592.58,1661.48 ; CON4.21@3591,1660 CON4.21@3592.48,1661.48 ; CON4.21@3592,1665 CON4.21@3594,1663
  Bottom Layer w10: SGG.1 2204,3059 3406,1857 3485,1857 3504,1838 3504,1761 ; 3504,1764 3504,1675 v1@3509.32,1669.68
  other v1: 3512,1661
SPICLK: A1.1 CON4.27@3602.43,1897.7 | length 1782
  Top Layer w10: A1.1 2259.37,908.37 2310.5,959.5
  Top Layer w12: 2310,958 3211,1859 3505,1859 3543.7,1897.7 CON4.27@3592.58,1897.7
SPIMISO: A1.9 CON4.25@3602.43,1818.96 | length 1643.9
  Top Layer w10: A1.9 2453.69,888.69
  Top Layer w12: 2455,890 2494,929 2494,1056 3219,1781 3509,1781 3546.96,1818.96 CON4.25@3592.58,1818.96
SPIMOSI: A1.10 CON4.26@3405.57,1818.96 | length 1466.1
  Top Layer w10: A1.10 2434.37,908.37 2464,938 ; 3217,1819 3342,1819 ; 3337,1819 CON4.26@3415.42,1818.96
  Top Layer w12: 2464,938 2464,1066 3217,1819
SW: CON4.18@3405.57,1504 R20.1 U5.1 | length 2676.9
  Top Layer w10: R20.1@1149.76,1620 1149.76,1548.24 1237,1461 1575,1461 1605,1491 1605,1540 1823,1540 v1@1825,1542 ; v1(2748,1231) 3021,1504 CON4.18@3415.42,1504
  Bottom Layer w10: v1(1825,1540) 2439,1540 v1(2748,1231)
TSXM: JMINI.37 TS.1 V2.1 | length 1045.4
  Top Layer w10: TS.1@140,897 TS.1 144,901 V2.1
  Bottom Layer w10: TS.1@144,904 139,909 139,1053.81 386,1300.81 386,1479.35 324.35,1541 JMINI.37@234,1541
TSXP: JMINI.38 TS.3 V4.1 | length 1294.7
  Top Layer w10: TS.3@137,704 140,701 V4.1
  Bottom Layer w10: TS.3@141,695 121,695 66,750 66,1009.32 365.84,1309.16 365.84,1471 316,1520.84 JMINI.38
TSYM: JMINI.39 TS.2 V1.1 | length 1231.7
  Top Layer w10: v5(19,832) 54,797 TS.2@148,797 ; TS.2 316,799 V1.1@324,807
  Bottom Layer w10: v5(19,832) 19,990.16 346.15,1317.31 346.15,1462.85 307.85,1501.15 JMINI.39
TSYP: JMINI.40 TS.4 V3.1 | length 1366
  Top Layer w10: TS.4 314,599 V3.1@318,603
  Bottom Layer w10: TS.4@142,598 128,598 -21,747 -21,978 326.47,1325.47 326.47,1454.69 299.69,1481.47 JMINI.40
VCC: A1.8 C1.2 C2.2 C4.2 C5.2 C9.2 C10.2 C17.2 pad.0@711,821 R9.2 R11.1 R12.1 U1.2 U1.6 U2.2 U2.6 U3.2 U3.6 U4.2 | length 8183.7
  Top Layer w10: U1.6 556,57 690.5,191.5 693,194 ; R11.1@1515,1013 1516.12,1011.88 R12.1@1636,1011.88 ; A1.8@2400,868 2401,869 A1.8 2597,869 v5@2650,922 ; R9.2@2770,934 R9.2@2811,934
  Top Layer w12: U4.2 1036,884 1462,884 1513,935 R11.1@1513,1005 ; C4.2 C5.2 1640.88,436.12 1648,429 1648,73 1650,71 ; C9.2 C10.2 2667.88,60 2667.88,59.12 2672,55
  Top Layer w20: v5(2654,927) 2662.12,935.12 R9.2
  Top Layer w50: U4.2 590,750 590,292 690.5,191.5 828,54 U1.2@1080,54 ; U1.2@1093,56 1097,60 U2.2 2667.88,60 ; C9.2@2660,589 C9.2@2666,583 ; 2672,60 2935,60 ; 2934,57 U3.2@3202,57
  Bottom Layer w20: U4.2 1041,879 2607,879 v5@2656,928
VCLK: JMINI.36 JTCON.38 | length 1184.5
  Top Layer w10: JTCON.38 392.25,2248.76 v1(412,2229)
  Bottom Layer w10: JMINI.36 452.21,1560.21 550,1658 550,2091 v1@414,2227
VDD: CON4.1@3602.43,874.08 JMINI.1 JMINI.2 JTCON.3 JTCON.4 JTCON.5 JTCON.6 JTCON.7 K1.5 R2.2 R18.1 VDD.1 | length 8894
  Top Layer w10: JTCON.3@226,1560 JTCON.3@227,1559 ; JTCON.4 303.47,1579.47 ; JTCON.5 301.85,1599.15 305,1596 ; JTCON.6 293.83,1618.84 294,1619 ; JTCON.7 274.48,1638.52 294,1619 ; JTCON.3@257,1560 284,1560 303.47,1579.47 ; 305.5,1581.5 314,1590 ; 308,1579 307.53,1579.47 303.47,1579.47 ; 314,1599 294,1619
  Top Layer w12: 1657,2107 1660,2104 R2.2 ; 2418,1544 2420,1542 R18.1@2420,1455.12
  Top Layer w25: v3(375,2294) 1376,2294 1382,2300
  Top Layer w50: 321,1596 684,1596 1426,2338 1426,2343 1717,2052 1717,2049 1846,1920 1846,1771 2067,1550 2550,1550 2643.5,1456.5 v3@2647,1453 ; K1.5@1430,2344 K1.5 ; v3(3428,678) 3429,677 v3(3519,677) ; v3@3516,679 3592.58,755.58 CON4.1@3592.58,874.08
  Bottom Layer w10: JMINI.2@225,2229 JMINI.2 JMINI.1 287.18,2249.18 ; JMINI.2@234,2230 274,2230 287.18,2243.18 287.18,2246.18
  Bottom Layer w20: 287.18,2246.18 333,2292 v3@375,2292
  Bottom Layer w50: v3(2605,1493) 2605,1496 2644,1457 v3@2645,1456 ; v3(2642,1455) 2650,1455 3427,678 v3(3428,678) v3@3511,678 ; VDD.1@3434,2811 3647,2598 3647,804 v3@3523,680 ; v3@3508,677 v3(3519,677)
VDEN: JMINI.33 JTCON.9 | length 181.9
  Top Layer w10: JTCON.9@225,1677 226,1678 286,1678 v2@302,1662
  Bottom Layer w10: JMINI.33 285.26,1619.26 303,1637 v2@303,1650
  other v2: 302,1657
VEE: K1.4 LA.2 LB.2 LR.2 pad.1 U4.1 U5.8 | length 4987.5
  Top Layer w12: U5.8 1656.54,1352.54 v2(1682,1378)
  Top Layer w50: K1.4@1425,2636 1549,2760 1966,2760 ; 1969,2763 2557,3351 LB.2@2557,3421
  Bottom Layer w12: U4.1 1009,1240 1196,1427 1637,1427 v2@1683,1381
  Bottom Layer w50: U4.1 880,2097 K1.4@1425,2642 ; LB.2@2554,3416 2554,3485 2589,3520 2764,3520 2866,3418 2866,3475 2923,3532 3069,3532 LA.2
VSYNC: JMINI.34
pads on no net: CON4.0 CON4.1@3543.37,874.08 CON4.2 CON4.3@3543.37,952.82 CON4.4 CON4.5 CON4.7 CON4.9@3543.37,1189.04 CON4.10 CON4.11 CON4.12@3464.63,1267.78 CON4.13@3543.37,1346.52 CON4.14@3464.63,1346.52 CON4.15 CON4.16@3464.63,1425.26 CON4.17 CON4.18@3464.63,1504 CON4.19 CON4.20@3464.63,1582.74 CON4.21@3543.37,1661.48 CON4.22@3464.63,1661.48 CON4.23 CON4.25@3543.37,1818.96 CON4.26@3464.63,1818.96 CON4.27@3543.37,1897.7 CON4.28@3464.63,1897.7 CON4.29 CON4.30 CON4.31 CON4.32@3464.63,2055.18 CON4.33 CON4.34 JMINI.31 K1.3 K1.6 PWR.4 U1.1 U1.5 U1.7 U1.8 U2.1 U2.5 U2.7 U2.8 U3.1 U3.5 U3.7 U3.8 U10.1 U10.3 U10.5

## Polygon pours and split planes (outlines as drawn)
GND on Top Layer "TopGND" (solid, remove dead copper, pour order 1000): -136,-137 -136,3758 3758,3758 3759,3758 3759,-137
GND on Bottom Layer "BotGND" (solid, remove dead copper, pour order 1001): -135,-136 -135,3757 3758,3757 3759,3757 3759,-136

## Other copper
Top Layer:
  pour cut-out: 172,1550 280,1550 280,1508 172,1508
  pour cut-out: 280,2302 172,2302 172,2262 280,2262
Multi-Layer:
  pour cut-out: 3447,2151 3447,857 3561,857 3561,2151

## Silkscreen, mask and mechanical layers (free items; w line width, h text height)
Drill Drawing:
  text ".legend" at 4327,939 h40

## Dimensions
-0.17,-0.17 to -0.17,3622.86 on Mechanical 1
-0.17,-0.17 to 3621.87,-0.17 on Mechanical 1

## Text inside footprints (layer, text, board x,y; h text height)
C12: Top Overlay "+" at 776.5,2489.53 h59.06 r180
C13: Top Overlay "+" at 863.5,2770.47 h59.06
CON4: Top Overlay "1" at 3612.27,667.39 h50 r90
PWR: Top Overlay "4" at 162.52,2927.01 h50; Top Overlay "1" at 158.27,3149.06 h50; Top Overlay "6" at 809.61,2919.13 h50; Top Overlay "3" at 801.73,3145.12 h50
U4: Top Overlay "3" at 735.32,1159.69 h59.06 r270; Top Overlay "2" at 735.32,1059.69 h59.06 r270; Top Overlay "1" at 735.31,1249.84 h59.06 r270
?: Top Overlay "No. de Serie:" at 1190,886 h50